# Altium PCB stm8l_resp_v2.0.PcbDoc
Units mil, origin at the board's own origin, x right, y up, seen from the top; angles counter-clockwise.
Board outline 2000 x 1200 mil, 2 copper layers (Top Layer, Bottom Layer); 68 components, 55 nets, 225 pads, 50 vias.
Unrouted connection lines stored in the file: 1.
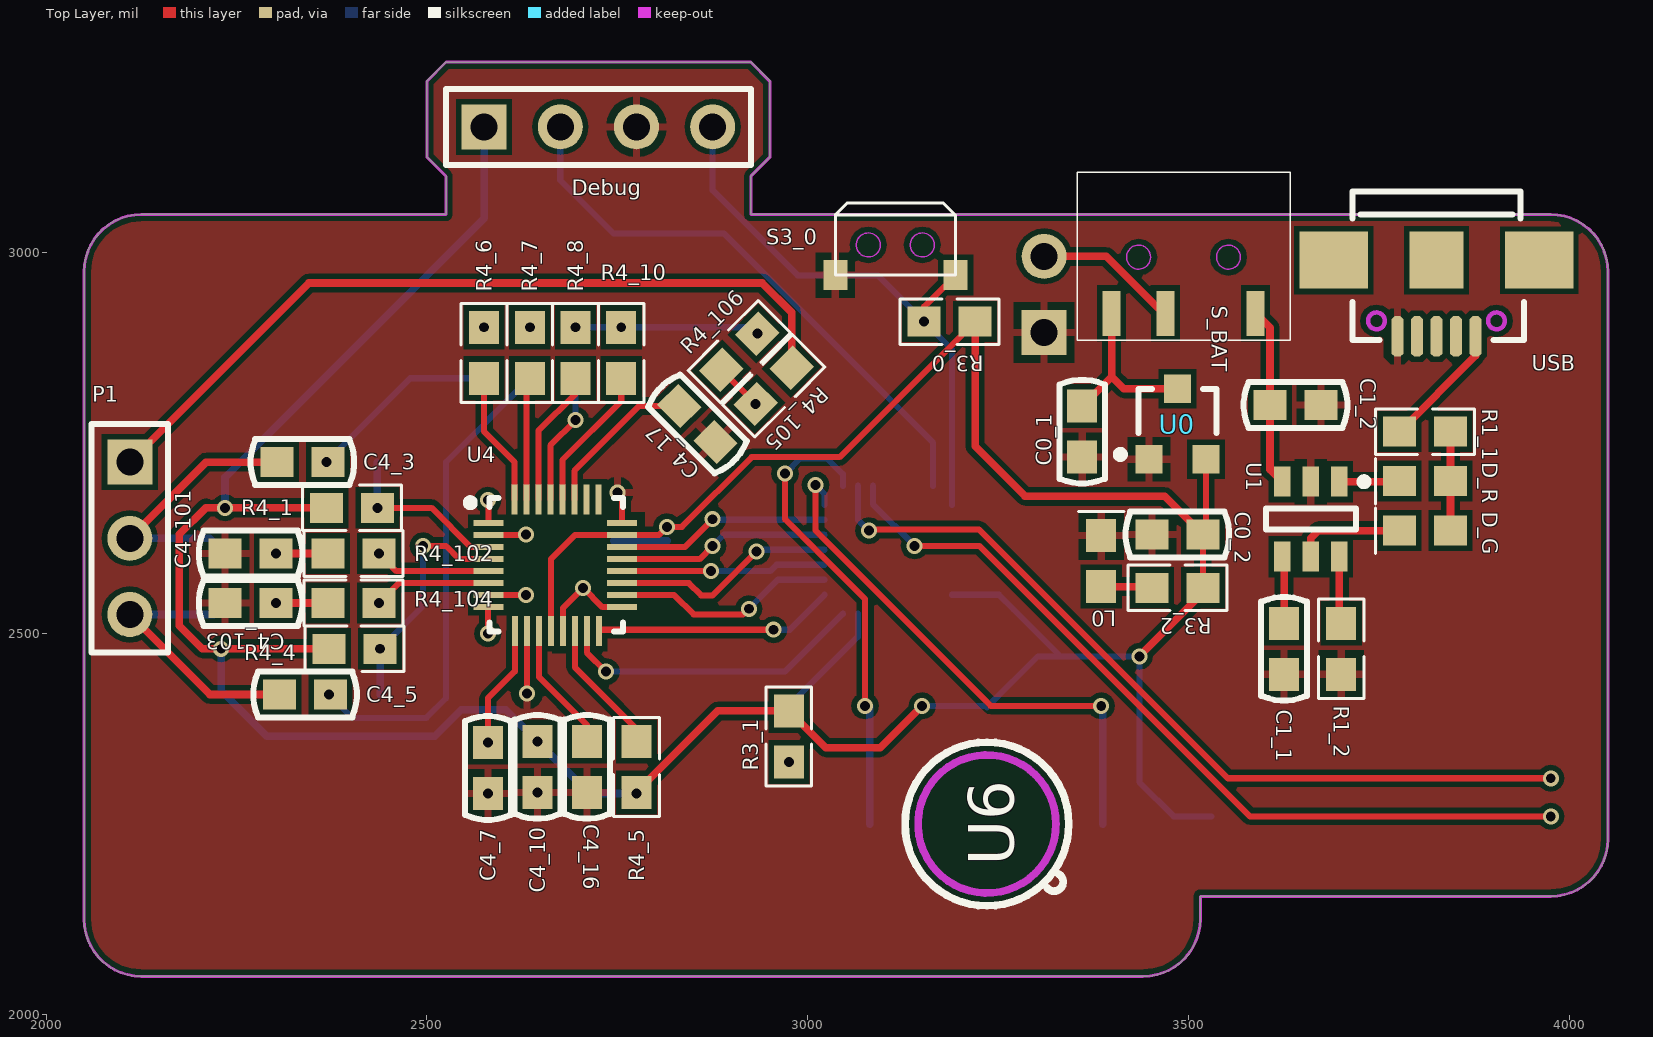
[diagram p0: Top Layer view]
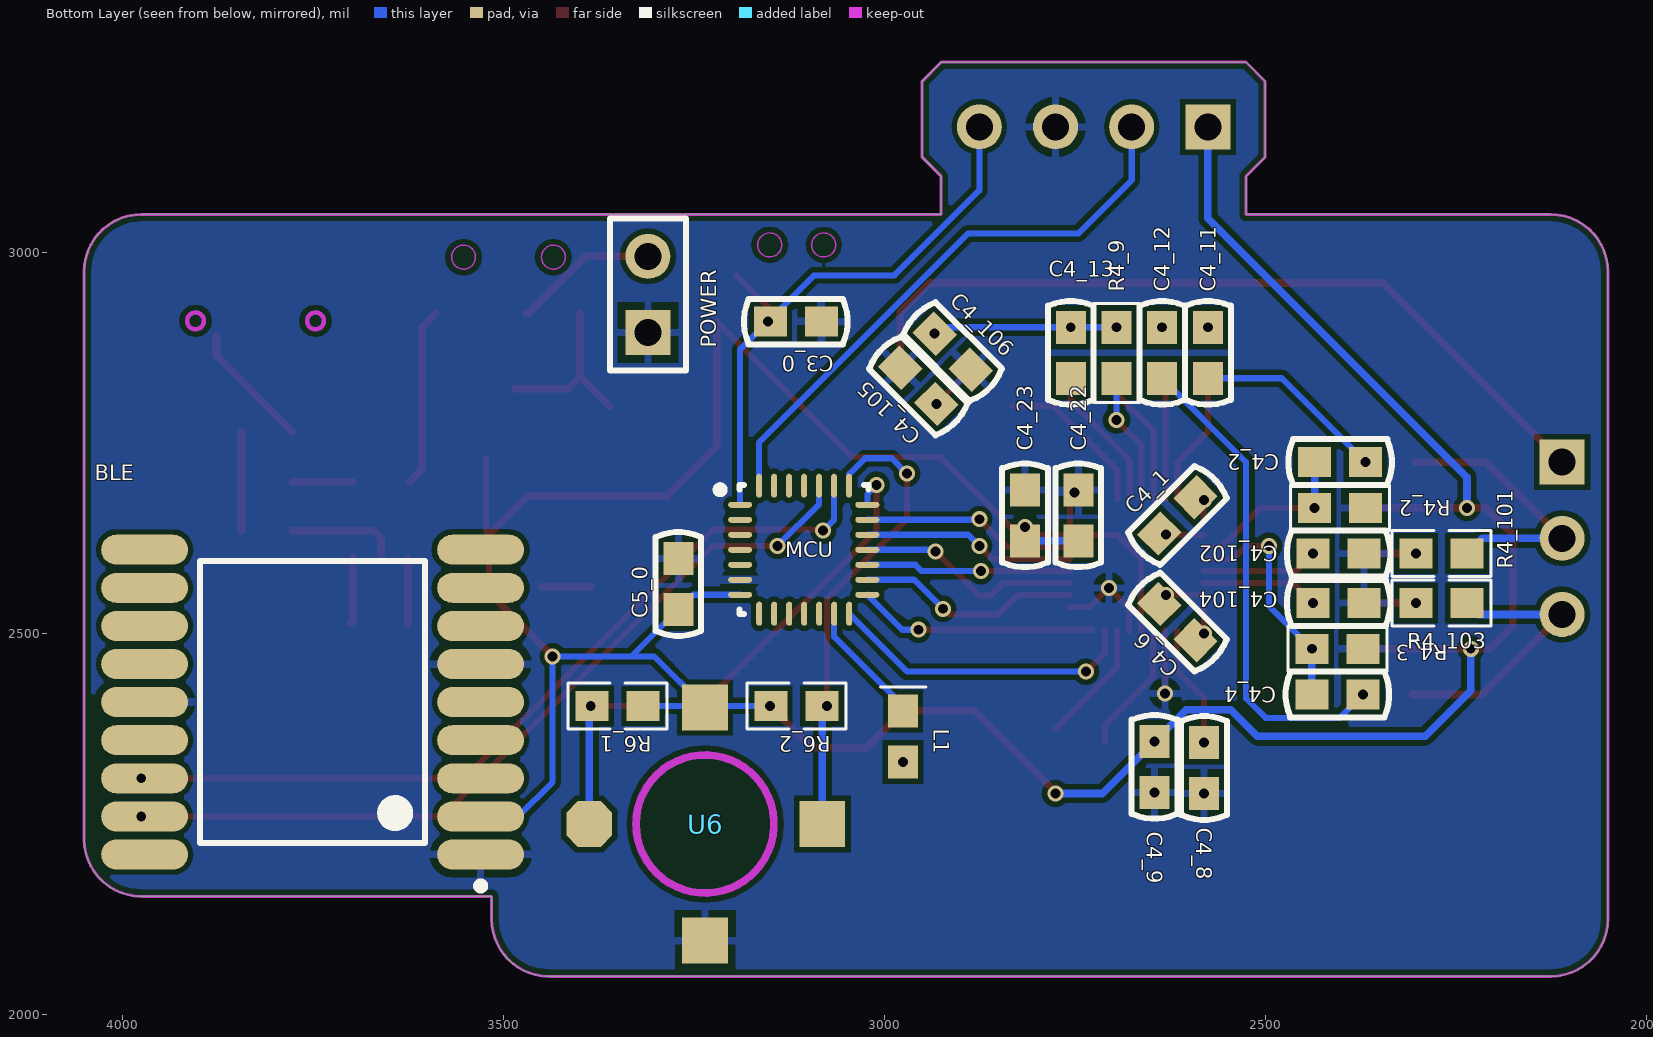
[diagram p1: Bottom Layer view, seen from below]

## Layer stack, top to bottom
Top Layer: signal copper 1.4
Dielectric: dielectric 12.6, FR-4, Dk 4.8
Bottom Layer: signal copper 1.4

## Board outline
2125,2050 cw(c2125,2125) 2050,2125 2050,2975 cw(c2125,2975) 2125,3050 2525,3050 2525,3100 2500,3125 2500,3225 2525,3250 2925,3250 2950,3225 2950,3125 2925,3100 2925,3050 3975,3050 cw(c3975,2975) 4050,2975 4050,2230 cw(c3975,2230) 3975,2155 3515,2155 3515,2125 cw(c3440,2125) 3440,2050

## Design rules (kind name [scope] priority, off if disabled: settings)
Clearance Clearance_1 [ispad vs ispad] p1: gap=4
Clearance [All] p2: gap=7
PolygonConnect [All] p1: connectstyle=Relief reliefconductorwidth=10 reliefentries=4 polygonreliefangle="90 Angle" airgapwidth=10
RoutingVias [All] p1: holewidth=28 width=50 viastyle="Through Hole" minholewidth=28 minwidth=50 maxholewidth=28 maxwidth=50
SolderMaskExpansion [All] p1: expansion=4
Width [All] p1: maxlimit=10 minlimit=8 preferedwidth=10
28 further rules are at their usual default settings.

## Components (designator, comment, footprint, x,y, rotation, side; value= is the part's Value field where it differs from the comment)
BLE "BM-S02" BM-S02 3750,2410 r0 bottom
C0_1 "Cap" C-RAD-0603 3360,2765 r90 top
C0_2 "Cap" C-RAD-0603 3485,2630 r0 top
C1_1 "Cap" C-RAD-0603 3625,2480 r90 top
C1_2 "Cap" C-RAD-0603 3640,2800 r0 top
C3_0 "Cap" C-RAD-0603 3115.94,2909.37 r0 bottom
C4_1 "Cap" C-RAD-0603 2615,2655 r135 bottom
C4_2 "Cap" C-RAD-0603 2401.54,2725 r0 bottom
C4_3 "Cap" C-RAD-0603 2336.54,2725 r0 top
C4_4 "Cap" C-RAD-0603 2405,2420 r0 bottom
C4_5 "Cap" C-RAD-0603 2340,2420 r0 top
C4_6 "Cap" C-RAD-0603 2615,2515 r225 bottom
C4_7 "Cap" C-RAD-0603 2580,2323.46 r90 top
C4_8 "Cap" C-RAD-0603 2580,2323.46 r270 bottom
C4_9 "Cap" C-RAD-0603 2645,2325 r270 bottom
C4_10 "Cap" C-RAD-0603 2645,2325 r270 top
C4_11 "Cap" C-RAD-0603 2575,2868.46 r90 bottom
C4_12 "Cap" C-RAD-0603 2635,2868.46 r90 bottom
C4_13 "Cap" C-RAD-0603 2755,2868.46 r270 bottom
C4_16 "Cap" C-RAD-0603 2710,2325 r270 top
C4_17 "Cap" C-RAD-0603 2855,2775 r315 top
C4_22 "Cap" C-RAD-0603 2745,2655 r270 bottom
C4_23 "Cap" C-RAD-0603 2815,2655 r270 bottom
C4_101 "Cap" C-RAD-0603 2268.46,2605 r180 top
C4_102 "Cap" C-RAD-0603 2403.46,2605 r180 bottom
C4_103 "Cap" C-RAD-0603 2268.46,2540 r180 top
C4_104 "Cap" C-RAD-0603 2403.46,2540 r180 bottom
C4_105 "Cap" C-RAD-0603 2955,2825 r45 bottom
C4_106 "Cap" C-RAD-0603 2910,2870 r225 bottom
C5_0 "Cap" C-RAD-0603 3270,2565 r90 bottom
D_G "LED0" 0603-LED 3810,2635 r180 top
D_R "LED0" 0603-LED 3810,2700 r180 top
Debug "Header 4" HDR4X1_A 2575,3165 r0 top
L0 "LED" 0603-LED 3385,2595 r90 top
L1 "LED" 0603-LED 2975,2365 r90 bottom
MCU "STM8L151G" STM8L-QFN28 3105,2610 r180 bottom
P1 "Header 3" HDR3X1_A 2110,2725 r270 top
POWER "Header 2" HDR1X2 3310,2895 r90 bottom
R1_1 "Res1" 0603-1 3810,2765 r180 top
R1_2 "Res1" 0603-1 3700,2480 r270 top
R3_0 "Res1" 0603-1 3185.94,2909.37 r180 top
R3_1 "Res1" 0603-1 2975,2365 r270 top
R3_2 "Res1" 0603-1 3485,2560 r180 top
R4_1 "Res1" 0603-1 2401.54,2665 r0 top
R4_2 "Res1" 0603-1 2401.54,2665 r0 bottom
R4_3 "Res1" 0603-1 2405,2480 r180 bottom
R4_4 "Res1" 0603-1 2405,2480 r180 top
R4_5 "Res1" 0603-1 2775,2325 r90 top
R4_6 "Res1" 0603-1 2575,2868.46 r90 top
R4_7 "Res1" 0603-1 2635,2868.46 r270 top
R4_8 "Res1" 0603-1 2695,2868.46 r270 top
R4_9 "Res1" 0603-1 2695,2868.46 r90 bottom
R4_10 "Res1" 0603-1 2755,2868.46 r90 top
R4_101 "Res1" 0603-1 2268.46,2605 r0 bottom
R4_102 "Res1" 0603-1 2403.46,2605 r0 top
R4_103 "Res1" 0603-1 2268.46,2540 r0 bottom
R4_104 "Res1" 0603-1 2403.46,2540 r0 top
R4_105 "Res1" 0603-1 2955,2825 r225 top
R4_106 "Res1" 0603-1 2910,2870 r45 top
R6_1 "Res1" 0603-1 3350,2405 r180 bottom
R6_2 "Res1" 0603-1 3115,2405 r0 bottom
S3_0 "SW-PB" SW_PB2_2*4 3035.94,3049.37 r0 top
S_BAT "SW-SPDT" SWITCH_1P2T 3625,2940 r180 top
U0 "MCP1700" SOT-23 3485,2775 r0 top
U1 "TP4057" TP4057 3660,2650 r270 top
U4 "ADS1292R" ADS1292R-QFN-32 2670,2590 r0 top
U6 "MLX90615" MLX90615-2 3235,2250 r90 top
USB "USB_M" USB_MICRO 3825,2990 r180 top

## Footprints (in the part's own frame and the unit in brackets; to place one, negate y for a bottom-side part, rotate by r counter-clockwise, add the part's x,y. Pads: shape width x height; smd on the part's side, far side on the other; paste and mask are expansions set on the pad)
0603-1 [mm] "贴片带丝印"
  rect 1.1x1 smd: 1(-0.85,0) 2(0.85,0)
  silkscreen extent -1.65,-0.76 1.65,0.76, body extent -1.14,-0.38 1.14,0.38, height 1
0603-LED [mm]
  rect 1.1x1 smd: 1(-0.85,0) 2(0.85,0)
  silkscreen extent 1.65,-0.76 1.65,0.76, body extent -1.14,-0.38 1.14,0.38, height 1
ADS1292R-QFN-32 [mm] "QFN, 32-Leads, Body 4.00x4.00mm, Pitch 0.40mm, Thermal Pad 2.80x2.80mm, IPC Medium Density"
  rect 1x0.2 smd: 1(-2.261,1.397) 2(-2.261,0.997) 3(-2.261,0.597) 4(-2.261,0.197) 5(-2.261,-0.203) 6(-2.261,-0.603) 7(-2.261,-1.003) 8(-2.261,-1.403) 17(2.184,-1.403) 18(2.184,-1.003) 19(2.184,-0.603) 20(2.184,-0.203) 21(2.184,0.197) 22(2.184,0.597) 23(2.184,0.997) 24(2.184,1.397)
  rect 0.2x1 smd: 9(-1.385,-2.195) 10(-0.985,-2.195) 11(-0.585,-2.195) 12(-0.185,-2.195) 13(0.215,-2.195) 14(0.615,-2.195) 15(1.015,-2.195) 16(1.415,-2.195) 25(1.397,2.184) 26(0.997,2.184) 27(0.597,2.184) 28(0.197,2.184) 29(-0.203,2.184) 30(-0.603,2.184) 31(-1.003,2.184) 32(-1.403,2.184)
  silkscreen extent -3,-2.22 2.22,2.23, body extent -2.08,-2.04 2.07,2.11, height 1
BM-S02 [mm] "TQFP, 18-Leads, Body 11.20x15.10mm, Pitch 1.27mm, IPC Medium Density"
  oval 2.9x1 smd: 1(-5.6,5.08) 2(-5.6,3.81) 3(-5.6,2.54) 4(-5.6,1.27) 5(-5.6,0) 6(-5.6,-1.27) 7(-5.6,-2.54) 8(-5.6,-3.81) 9(-5.6,-5.08) 10(5.6,-5.08) 11(5.6,-3.81) 12(5.6,-2.54) 13(5.6,-1.27) 14(5.6,0) 15(5.6,1.27) 16(5.6,2.54) 17(5.6,3.81) 18(5.6,5.08)
  silkscreen extent -5.72,-4.7 3.75,6.25, body extent -5.6,-6.03 5.6,9.07, height 1.2
C-RAD-0603 [mm] "贴片电容"
  rect 1.1x1 smd: 1(-0.85,0) 2(0.85,0)
  silkscreen extent -1.73,-0.76 1.73,0.76, body extent -1.14,-0.38 1.14,0.38, height 1
HDR1X2 [mm] "Connector; Header; 2 Position"
  rect 1.5x1.5 hole 0.9: 1(0,0)
  round 1.5 hole 0.9: 2(2.54,0)
  silkscreen extent -1.27,-1.27 3.81,1.27
HDR3X1_A [mm] "Connector; Header; 3 Position"
  rect 1.5x1.5 hole 0.9: 1(0,0)
  round 1.5 hole 0.9: 2(2.54,0) 3(5.08,0)
  silkscreen extent -1.27,-1.27 6.35,1.27
HDR4X1_A [mm] "Connector; Header; 4 Position"
  rect 1.5x1.5 hole 0.9: 1(0,0)
  round 1.5 hole 0.9: 2(2.54,0) 3(5.08,0) 4(7.62,0)
  silkscreen extent -1.27,-1.27 8.89,1.27
MLX90615-2 [mil] "红外体温传感器"
  oct 60x60 smd far side: 1(0,-152)
  rect 60x60 smd far side: 2(153,0) 3(0,154) 4(-153,0)
  Keep-Out Layer circle w10: c0,0 r90.55
  silkscreen extent -107,-107 107,107
SOT-23 [mm]
  rect 0.9x0.95 smd: 1(-0.95,-1.175) 2(0.95,-1.175) 3(0,1.175)
  silkscreen extent -2.03,-1.14 1.3,1.18
STM8L-QFN28 [mm] "QFN, 28-Leads, Body 4.00x4.00mm, Pitch 0.50mm, Thermal Pad 3.30x3.30mm, IPC Medium Density"
  oval 0.8x0.2 smd: 1(-2.134,1.499) 2(-2.134,0.999) 3(-2.134,0.499) 4(-2.134,-0.001) 5(-2.134,-0.501) 6(-2.134,-1.001) 7(-2.134,-1.501) 15(2.108,-1.501) 16(2.108,-1.001) 17(2.108,-0.501) 18(2.108,-0.001) 19(2.108,0.499) 20(2.108,0.999) 21(2.108,1.499)
  oval 0.2x0.8 smd: 8(-1.499,-2.134) 9(-0.999,-2.134) 10(-0.499,-2.134) 11(0.001,-2.134) 12(0.501,-2.134) 13(1.001,-2.134) 14(1.501,-2.134) 22(1.499,2.134) 23(0.999,2.134) 24(0.499,2.134) 25(-0.001,2.134) 26(-0.501,2.134) 27(-1.001,2.134) 28(-1.501,2.134)
  silkscreen extent -2.93,-2.15 2.15,2.15, body extent -2.01,-2 1.99,2, height 0.75
SW_PB2_2*4 [mm] "2*4"
  rect 0.8x1 smd: 1(0,-2.007) 2(4.013,-2.007)
  Keep-Out Layer circle w0.051: c1.1,-1 r0.4
  Keep-Out Layer circle w0.051: c2.9,-1 r0.4
  silkscreen extent 0,-2 4,0.41
SWITCH_1P2T [mm]
  rect 0.6x1.5 smd: 1(0.95,0.5) 2(3.95,0.5) 3(5.75,0.5)
  Keep-Out Layer circle w0.051: c1.854,-1.372 r0.4
  Keep-Out Layer circle w0.051: c4.851,-1.372 r0.4
  silkscreen extent -0.2,-4.2 6.9,1.4, body extent 0,-4.17 6.68,0, height 1.4
TP4057 [mm] "SOT23, 6-Leads, Body 2.90x2.90mm, Pitch 0.95mm, IPC Medium Density"
  rect 1x0.55 smd: 1(-1.25,0.95) 2(-1.25,0) 3(-1.25,-0.95) 4(1.25,-0.95) 5(1.25,0) 6(1.25,0.95)
  silkscreen extent -1.37,-1.5 0.35,1.9, body extent -0.85,-1.5 0.85,1.5, height 1.1
USB_MICRO [mm] "USB方孔"
  oct 0.4x1.35 smd: 1(-1.3,2.54) 2(-0.65,2.54) 3(0,2.54) 4(0.65,2.54) 5(1.3,2.54)
  rect 2.286x1.9 smd: 6(3.429,0) 7(-3.429,0)
  rect 1.8x1.9 smd: 8(0,0)
  Keep-Out Layer circle w0.15: c2,2.023 r0.28
  Keep-Out Layer circle w0.15: c-2,2.023 r0.28
  silkscreen extent -2.92,-2.29 2.79,2.67

## Part data
BLE: "蓝牙4.0模块"
C0_1 C0_2 C1_1 C1_2 C3_0 C4_1 C4_2 C4_3 C4_4 C4_5 C4_6 C4_7 C4_8 C4_9 C4_10 C4_11 C4_12 C4_13 C4_16 C4_17 C4_22 C4_23 C4_101 C4_102 C4_103 C4_104 C4_105 C4_106 C5_0: "无极性电容"
D_G D_R: "发光二极管"
Debug P1: "接插件"
MCU: "STM8L单片机28引脚"
POWER: "Header, 2-Pin"
R1_1 R1_2 R3_0 R3_1 R3_2 R4_1 R4_2 R4_3 R4_4 R4_5 R4_6 R4_7 R4_8 R4_9 R4_10 R4_101 R4_102 R4_103 R4_104 R4_105 R4_106 R6_1 R6_2: "贴片电阻"
S3_0: "微动开关"
S_BAT: "开关"
U0: "微型稳压芯片"
U1: "锂电池充电管理"
U4: "集成呼吸阻抗 ECG 前端"
U6: "红外体温传感器"
USB: "MicroUSB接口"

## Via types
v1: diameter 21, hole 13, Top Layer to Bottom Layer, 50 vias

## Nets (pads, with @x,y where several pads share a name; then routed paths per layer and width w, separated by ;. In a path a pad name is that pad's centre, name@x,y a point inside that pad or via, vN(x,y) a via of type N, cw(c..) or ccw(c..) an arc to the next point about the centre after c; other vN are vias at no path point)
1N2N: C4_102.1 R4_102.2 U4.5 | length 153.6
  Top Layer w8: v1(2436.93,2605) 2459.93,2582 U4.5
1N2P: C4_104.1 R4_104.2 U4.6 | length 154.9
  Top Layer w8: v1(2436.93,2540) 2463.18,2566.25 U4.6
3.3V: BLE.2 C0_2.2 C4_9.1 C4_10.1 C4_22.2 C4_23.2 C5_0.1 Debug.1 MCU.7 R3_0.1 R3_1.1 R3_2.1 R4_1.1 R4_4.2 R4_5.1 R6_1.2 R6_2.2 U0.2 U4.12 U4.23 U6.2 | length 4830
  Top Layer w8: U4.12 2662.71,2597.71 2694.25,2629.25 U4.23 2804.25,2629.25 v1(2815,2640) 2834.59,2640 2926.09,2731.5 3041.54,2731.5 R3_0.1 ; R3_2.1 C0_2.2 3522.4,2633.94 U0.2
  Top Layer w10: R4_1.1 v1(2235,2665) 2210,2665 2175,2630 2175,2510 2205,2480 v1(2230,2480) R4_4.2 ; R4_5.1 2881.93,2398.46 R3_1.1 3023.46,2350 3095,2350 v1(3150,2405) ; R3_0.1 3219.41,2745.59 3285,2680 3468.46,2680 C0_2.2 ; v1(3435,2470) 3518.46,2553.46 R3_2.1
  Bottom Layer w8: R6_2.2 U6.2@3237,2405 ; MCU.7 3250.65,2550.89 C5_0.1 3331.54,2470 ; U6.2 U6.2@3237,2405 ; R6_1.2 U6.2@3237,2405 ; BLE.2 3480,2260 3435,2305 v1(3435,2470) 3331.54,2470 ; U6.2@3237,2405 3302,2470 3331.54,2470
  Bottom Layer w10: v1(2230,2480) 2230,2425 2290,2365 2510,2365 2545,2400 2603.46,2400 v1(2645,2358.46) 2713.46,2290 v1(2775,2290) ; v1(2235,2665) 2235,2705 2575,3045 Debug.1 ; C4_22.2 C4_23.2
5V: R1_1.2 USB.1 | length 166.3
  Top Layer w10: R1_1.2 3876.18,2864.65 USB.1
GND: BLE.1 BLE.6 BLE.14 C0_1.1 C0_2.1 C1_1.1 C1_2.2 C3_0.1 C4_7.1 C4_8.2 C4_9.2 C4_10.2 C4_16.2 C4_17.2 C4_22.1 C4_23.1 C4_101.2 C4_102.2 C4_103.2 C4_104.2 C4_105.2 C4_106.2 C5_0.2 Debug.3 L0.2 MCU.6 POWER.1 R1_2.2 R4_2.1 R4_3.2 S3_0.1 U0.1 U1.2 U4.10 U4.13 U4.17 U4.24 U6.4 USB.5 | length 253.7
  Top Layer w8: v1(2631.21,2421.21) U4.10 ; U4.13 2678.46,2533.46 v1(2705,2560) 2730.24,2534.76 U4.17 ; v1(2750,2685) 2756,2679 U4.24
  other v1: 2580,2290 2645,2291.54
IIC_SCL: MCU.22 R6_2.1 U6.3 | length 610.9
  Top Layer w8: v1(2970,2710) 2970,2650 3075,2545 v1(3075,2405)
  Bottom Layer w8: v1(2970,2710) 2990,2730 3025,2730 3046,2709 MCU.22
  Bottom Layer w10: U6.3 R6_2.1@3081,2404.46
IIC_SDA: MCU.21 R6_1.1 U6.1 | length 712.7
  Top Layer w8: v1(3010,2695) 3010,2635 3240,2405 v1(3385,2405)
  Bottom Layer w8: v1(3010,2695) 3022,2683 MCU.21
  Bottom Layer w10: U6.1 R6_1.1@3387,2401.46
LA: C4_5.1 P1.3 R4_103.1 | length 371.2
  Top Layer w10: P1.3 2215,2420 C4_5.1
  Bottom Layer w10: P1.3 2220,2525 R4_103.1
LED0: L1.2 MCU.13 | length 158.5
  Bottom Layer w8: L1.2@2975,2405 3065.57,2495.57 MCU.13
NetC1_1_2: C1_1.2 U1.4 | length 84.9
  Top Layer w10: C1_1.2 U1.4@3625,2598.39
NetC4_1_1: C4_1.1 U4.2 | length 48.2
  Top Layer w8: U4.2 v1@2629.24,2629.24
  other v1: 2630,2630
NetC4_1_2: C4_1.2 U4.1 | length 29
  Top Layer w8: U4.1 v1@2581,2674
  other v1: 2580,2675
NetC4_2_1: C4_2.1 C4_3.2 C4_11.1 | length 252.5
  Bottom Layer w8: v1(2368.07,2725) 2478.07,2835 C4_11.1
NetC4_2_2: C4_2.2 R4_1.2 R4_2.2 U4.3 | length 227.3
  Top Layer w8: v1(2435,2665) 2506.07,2665 2557.57,2613.5 U4.3
  Bottom Layer w10: v1(2435,2665) C4_2.2
NetC4_4_1: C4_4.1 C4_5.2 C4_12.1 | length 642.4
  Bottom Layer w8: v1(2371.54,2420) 2402.22,2389.31 2499.31,2389.31 2525,2415 2525,2725 C4_12.1
NetC4_4_2: C4_4.2 R4_3.1 R4_4.1 U4.4 | length 311.6
  Top Layer w8: v1(2495,2615) 2525,2615 2542.25,2597.75 U4.4
  Bottom Layer w8: v1(2438.46,2480) 2495,2536.54 v1(2495,2615)
  Bottom Layer w10: C4_4.2 v1(2438.46,2480)
NetC4_6_1: C4_6.1 U4.7 | length 49
  Top Layer w8: U4.7 v1(2630,2550.5)
NetC4_6_2: C4_6.2 U4.8 | length 43.8
  Top Layer w8: v1@2580,2510 v1(2580,2500) U4.8@2580,2533.76
NetC4_7_2: C4_7.2 C4_8.1 U4.9 | length 161.4
  Top Layer w8: v1(2580,2356.93) 2580,2415 2615.46,2450.46 U4.9
NetC4_11_2: C4_11.2 R4_6.2
  other v1: 2575,2901.93
NetC4_12_2: C4_12.2 R4_7.1
  other v1: 2635,2901.93
NetC4_13_2: C4_13.2 R4_10.1 U4.28 | length 191
  Top Layer w8: U4.28 2677.75,2727.75 2755,2805 R4_10.1
NetC4_101_1: C4_101.1 R4_101.2 R4_102.1 | length 68.1
  Top Layer w10: v1(2301.93,2605) R4_102.1
NetC4_103_1: C4_103.1 R4_103.2 R4_104.1 | length 68.1
  Top Layer w10: v1(2301.93,2540) R4_104.1
NetC4_105_1: C4_105.1 R4_105.2 R4_106.1 | length 63.6
  Top Layer w8: R4_106.1 v1(2931.34,2801.34)
NetD_G_1: D_G.1 D_R.1 R1_1.1 | length 130
  Top Layer w10: D_G.1 D_R.1 R1_1.1
NetD_G_2: D_G.2 U1.5 | length 144.9
  Top Layer w10: U1.5 3660,2625 3670,2635 D_G.2
NetD_R_2: D_R.2 U1.1 | length 78.3
  Top Layer w10: U1.1 D_R.2@3775.75,2699.21
NetL0_1: L0.1 R3_2.2 | length 65
  Top Layer w10: L0.1 R3_2.2@3450,2561.54
NetL1_1: L1.1 R3_1.2
  other v1: 2975,2331.54
NetPOWER_2: POWER.2 S_BAT.2 | length 190.4
  Top Layer w10: POWER.2 3391.55,2995 3466.23,2920.32 S_BAT.2
NetR1_2_1: R1_2.1 U1.6 | length 88.4
  Top Layer w10: U1.6 3697.4,2516.06 R1_2.1
NetR4_5_2: R4_5.2 U4.14 | length 162.1
  Top Layer w8: U4.14 2694.2,2455.8 R4_5.2@2775,2375
NetR4_6_1: R4_6.1 U4.32 | length 175.5
  Top Layer w8: R4_6.1 2575,2765 2614.76,2725.24 U4.32
NetR4_7_2: R4_7.2 U4.31 | length 154.5
  Top Layer w8: U4.31 R4_7.2@2630.5,2830.5
NetR4_8_2: R4_8.2 U4.30 | length 179.2
  Top Layer w8: U4.30 2646.25,2766.25 2695,2815 R4_8.2
NetR4_9_1: R4_9.1 U4.29 | length 172.7
  Top Layer w8: U4.29 2662,2747 v1(2695,2780)
  Bottom Layer w8: v1(2695,2780) R4_9.1
NRST: C3_0.2 Debug.4 MCU.1 R3_0.2 S3_0.2 | length 765.9
  Top Layer w8: v1(3152.48,2909.37) 3152.48,2928.91 S3_0.2
  Bottom Layer w8: Debug.4 2875,3081.66 2986.66,2970 3091.85,2970 v1(3152.48,2909.37) 3189,2872.85 MCU.1
RA: C4_3.1 P1.2 R4_101.1 | length 367.8
  Top Layer w10: P1.2 2210,2725 C4_3.1
  Bottom Layer w10: P1.2 2215,2625 R4_101.1
READY: MCU.20 U4.22 | length 280.4
  Top Layer w8: U4.22 2838.5,2613.5 v1(2875,2650)
  Bottom Layer w8: v1@2875.69,2649.31 MCU.20
RESET: MCU.14 U4.15 | length 406.3
  Top Layer w8: U4.15 2709.95,2475.05 v1(2735,2450)
  Bottom Layer w8: v1(2735,2450) 2969.89,2450 MCU.14
RL: P1.1 R4_105.1 | length 1054.7
  Top Layer w10: P1.1 2345,2960 2940,2960 2978.66,2921.34 R4_105.1
RL-OUT: C4_13.1 C4_106.1 R4_8.1 R4_9.2 R4_10.2 R4_106.2 | length 242.1
  Bottom Layer w8: v1(2695,2901.93) v1(2755,2901.93) 2925.4,2901.93 v1(2933.66,2893.66)
RXD: BLE.16 MCU.23 | length 1095.8
  Top Layer w8: v1(3080,2635) 3081.5,2636.5 3224.71,2636.5 3551.21,2310 v1(3975,2310)
  Bottom Layer w8: MCU.23 3065.69,2649.31 v1(3080,2635)
SAT0: C0_1.2 S_BAT.3 U0.3 | length 230.8
  Top Layer w10: C0_1.2 3398.62,2837.09 ; S_BAT.3 3398.62,2837.09 ; U0.3 3414.45,2821.26 3398.62,2837.09
SAT1: C1_2.1 S_BAT.1 U1.3 | length 235.6
  Top Layer w10: S_BAT.1 3606.54,2901.38 C1_2.1 3606.54,2715.28 U1.3
SPI_CLK: MCU.17 U4.20 | length 269.4
  Top Layer w8: U4.20 v1(2872.99,2582.01)
  Bottom Layer w8: v1(2872.99,2582.01) 2950.79,2582.01 2959.05,2590.26 MCU.17
SPI_CS: MCU.16 U4.18 | length 295.4
  Top Layer w8: U4.18 2824.49,2550.51 2850,2525 2915,2525 v1(2922.5,2532.5)
  Bottom Layer w8: v1(2922.5,2532.5) 2960.57,2570.57 MCU.16
SPI_MISO: MCU.19 U4.21 | length 279.2
  Top Layer w8: U4.21 2857.76,2597.76 v1(2875,2615)
  Bottom Layer w8: v1(2875,2615) 2889.63,2629.63 MCU.19
SPI_MOSI: MCU.18 U4.19 | length 297.6
  Top Layer w8: U4.19 2843.74,2566.26 2860,2550 2875,2550 v1(2932.5,2607.5)
  Bottom Layer w8: v1(2932.5,2607.5) 2934.94,2609.94 MCU.18
START: MCU.15 U4.16 | length 313.9
  Top Layer w8: U4.16@2727.1,2505 v1(2955,2505)
  Bottom Layer w8: v1(2955,2505) 2976.11,2505 MCU.15
SWIM: Debug.2 MCU.28 | length 758.5
  Bottom Layer w8: Debug.2 2675,3095 2745,3025 2890,3025 3164.11,2750.89 MCU.28
TXD: BLE.17 MCU.24 | length 1083.7
  Top Layer w8: v1(3140,2615) 3225,2615 3580,2260 v1(3975,2260)
  Bottom Layer w8: MCU.24 3085.37,2669.63 v1(3140,2615)
VCAP1: C4_16.1 U4.11 | length 171.2
  Top Layer w8: U4.11 2646.96,2443.04 2710,2380 C4_16.1
VCAP2: C4_17.1 U4.27 | length 210.6
  Top Layer w8: U4.27 2693.5,2713.5 2778.66,2798.66 C4_17.1
pads on no net: BLE.3 BLE.4 BLE.5 BLE.7 BLE.8 BLE.9 BLE.10 BLE.11 BLE.12 BLE.13 BLE.15 BLE.18 MCU.2 MCU.3 MCU.4 MCU.5 MCU.8 MCU.9 MCU.10 MCU.11 MCU.12 MCU.25 MCU.26 MCU.27 U4.25 U4.26 USB.2 USB.3 USB.4 USB.6 USB.7 USB.8

## Polygon pours and split planes (outlines as drawn)
GND on Top Layer "Top Layer-No Net" (solid, remove dead copper, pour order 7): 2050,3250 4050,3250 4050,2050 2050,2050 2050,3250
GND on Bottom Layer "Top Layer-No Net" (solid, remove dead copper, pour order 9): 2050,3250 4050,3250 4050,2050 4045,2055 2050,2055 2050,3250

## Keep-outs
Keep-Out Layer:
  the board outline again, w3.94